# Altium PCB mag_pos_adapter_guide.PcbDoc
Units mm, origin at the board's own origin, x right, y up, seen from the top; angles counter-clockwise.
Board outline 27 x 27 mm, 2 copper layers (Top Layer, Bottom Layer), stack 1.071 mm thick; 9 components, 7 nets, 18 pads, 0 vias.
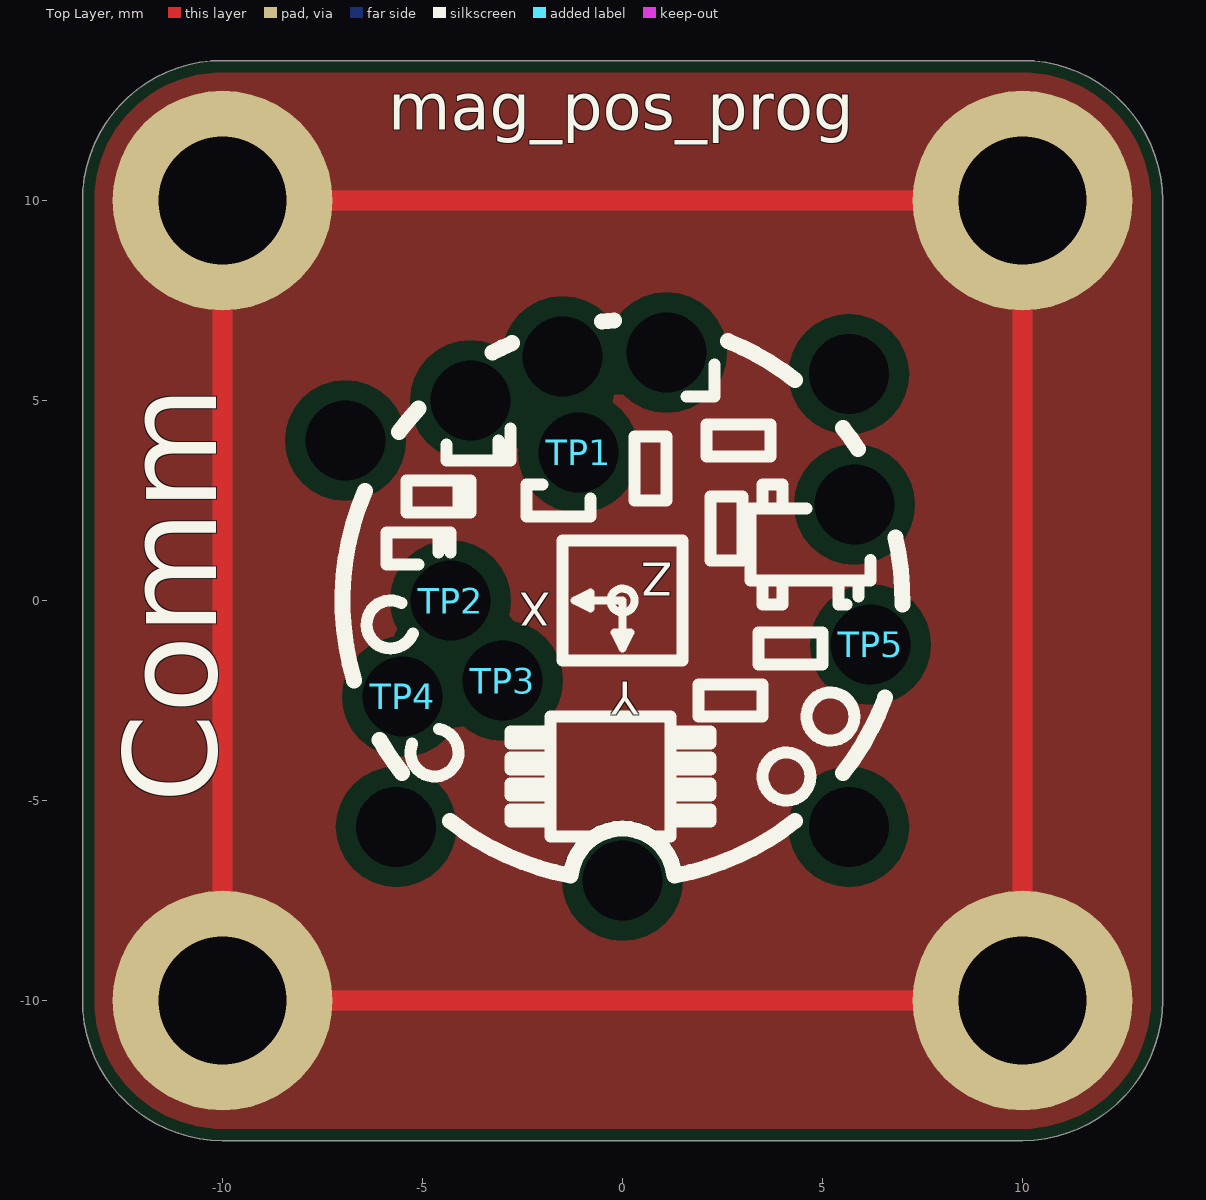
[diagram p0: Top Layer view]
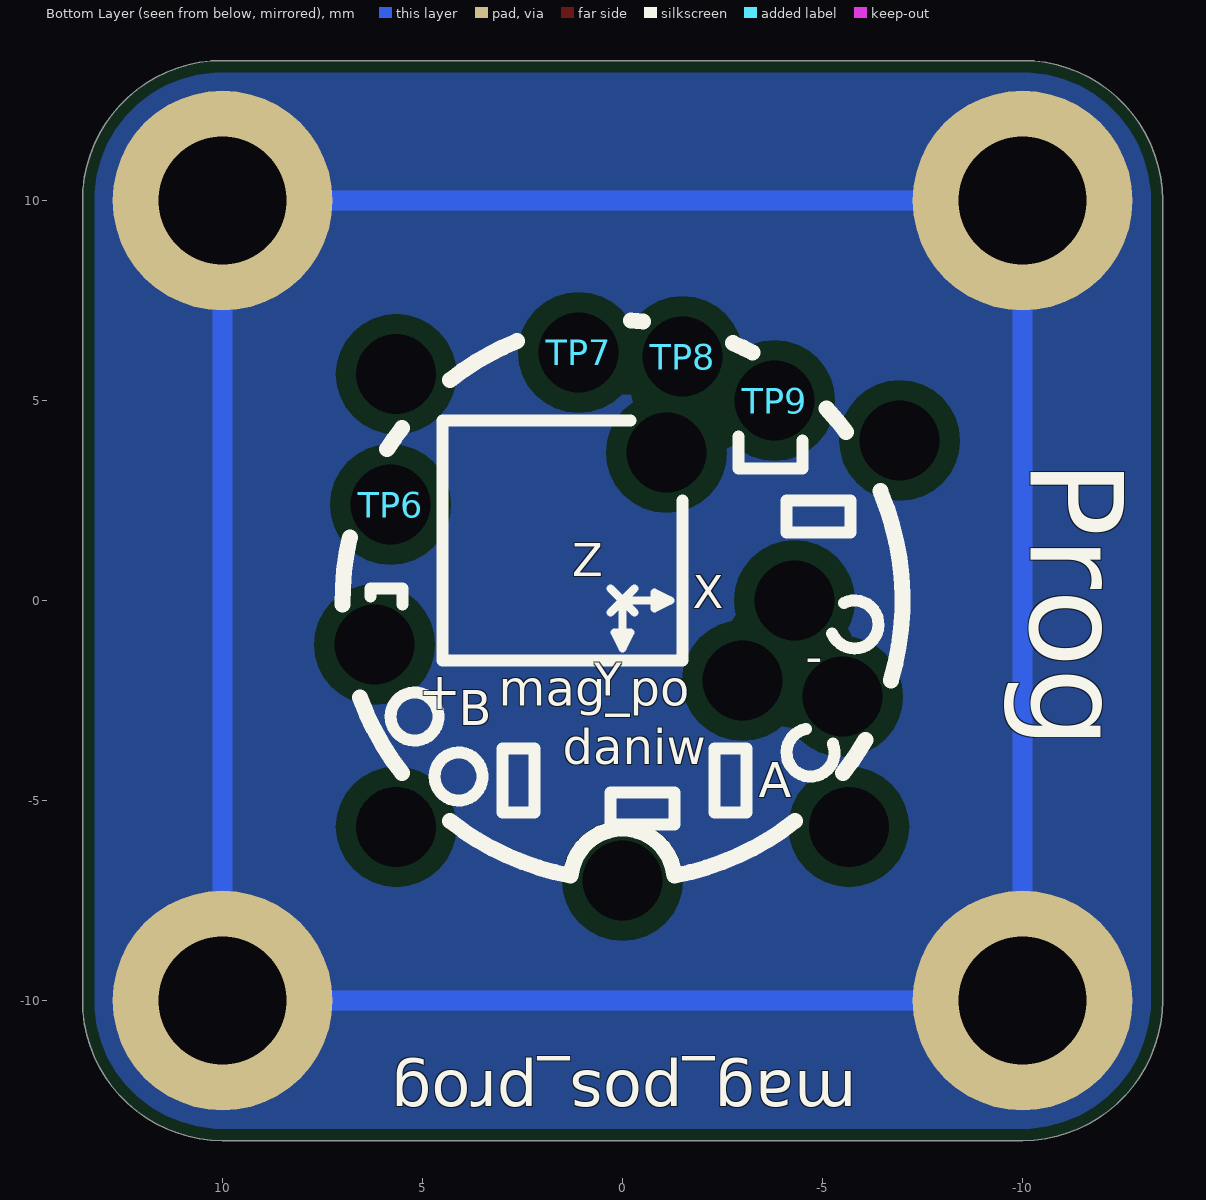
[diagram p1: Bottom Layer view, seen from below]

## Layer stack, top to bottom
Top Solder: solder mask 0.0102, Solder Resist, Dk 3.5
Top Layer: signal copper 0.0356
Dielectric 1: dielectric 1, FR-4, Dk 4.8
Bottom Layer: signal copper 0.0356
Bottom Solder: solder mask 0.0102, Solder Resist, Dk 3.5

## Board outline
-10,-13.5 cw(c-10,-10) -13.5,-10 -13.5,10 cw(c-10,10) -10,13.5 10,13.5 cw(c10,10) 13.5,10 13.5,-10 cw(c10,-10) 10,-13.5

## Design rules (kind name [scope] priority, off if disabled: settings)
Clearance [All] p1: gap=0.2 ignorepadtopadclearanceinfootprint=FALSE except(0: Arc-Hole Track-Hole SMDPad-Hole THPad-Hole Via-Hole Fill-Hole Region-Hole Text-Hole; 0.5: Poly-Hole)
ComponentClearance [All] p1: gap=0.2 collisioncheckmode=3 verticalgap=0.2 showdistances=FALSE
HoleSize [All] p1: absolutevalues=TRUE maxlimit=3.2 minlimit=0.3 maxpercent=80.000 minpercent=20.000
HoleToHoleClearance [All] p1: gap=0.3 allowstackedmicrovias=TRUE
MinimumAnnularRing [All] p1: minimumring=0.15
MinimumSolderMaskSliver [All] p1: minsoldermaskwidth=0.1
PolygonConnect PolygonConnect_Standoff [(ObjectKind = 'Pad') And (PadViaLibraryTemplate = 'c550h320')] p1: connectstyle=Direct reliefconductorwidth=0.254 reliefentries=4 polygonreliefangle="90 Angle" airgapwidth=0.254
PolygonConnect [All] p2: thpad.connectstyle=Relief thpad.reliefconductorwidth=0.3 thpad.reliefentries=4 thpad.polygonreliefangle="90 Angle" thpad.airgapwidth=0.3 smdpad.connectstyle=Relief smdpad.reliefconductorwidth=0.25 smdpad.reliefentries=4 smdpad.polygonreliefangle="90 Angle" smdpad.airgapwidth=0.25 via.connectstyle=Direct via.reliefconductorwidth=0.254 via.reliefentries=4 via.polygonreliefangle="90 Angle" via.airgapwidth=0.254
RoutingVias [All] p1: holewidth=0.35 width=0.7 viastyle="Through Hole" minholewidth=0.3 minwidth=0.65 maxholewidth=0.5 maxwidth=3
SilkToSilkClearance [All] p1: silktosilkclearance=0.1
SilkToSolderMaskClearance [IsPad] p1: minsilkscreentomaskgap=0.15 clearancetoexposedcopper=TRUE
SolderMaskExpansion SolderMaskExpansion_Via [IsVia] p1: expansion=0.102 istentingtop=TRUE
SolderMaskExpansion [All] p2: expansion=0.05 istentingtop=FALSE
Width [All] p1: maxlimit=0.5 minlimit=0.2 preferedwidth=0.2 minimp=50.000000 maximp=50.000000 favimp=50.000000
24 further rules are at their usual default settings.

## Classes and differential pairs
component class mag_pos_adapter: TP1 TP2 TP3 TP4 TP5 TP6 TP7 TP8

## Components (designator, comment, footprint, x,y, rotation, side; value= is the part's Value field where it differs from the comment)
TP1 "VCC" TP_SPRING_PROBE_1.7MM_2.5MM -1.1,3.7 r153.5 top
TP2 "RST" TP_SPRING_PROBE_1.7MM_2.5MM -4.3,0 r180 top
TP3 "TEST" TP_SPRING_PROBE_1.7MM_2.5MM -3,-2 r180 top
TP4 "GND" TP_SPRING_PROBE_1.7MM_2.5MM -5.5,-2.4 r270 top
TP5 "+5V" TP_SPRING_PROBE_1.7MM_2.5MM 6.2,-1.1 r270 top
TP6 "GND" TP_SPRING_PROBE_1.7MM_2.5MM 5.8,2.4 r270 bottom
TP7 "RX" TP_SPRING_PROBE_1.7MM_2.5MM 1.1,6.2 r0 bottom
TP8 "TX" TP_SPRING_PROBE_1.7MM_2.5MM -1.5,6.1 r153.5 bottom
TP9 "+5V" TP_SPRING_PROBE_1.7MM_2.5MM -3.8,5 r153.5 bottom

## Footprints (in the part's own frame and the unit in brackets; to place one, negate y for a bottom-side part, rotate by r counter-clockwise, add the part's x,y. Pads: shape width x height; smd on the part's side, far side on the other; paste and mask are expansions set on the pad)
TP_SPRING_PROBE_1.7MM_2.5MM [mm] "Spring probe sleeve 1.7mm hole diameter, 2.5mm pad size, Harwin S25-022"
  round 0 hole 2 unplated: 1(0,0)
  body extent -0.91,-0.91 0.92,0.91, height 5.44

## Part data
TP1 TP2 TP3 TP4 TP5 TP6 TP7 TP8 TP9: library part TP_SPRING_PROBE_1.7MM, "Spring probe sleeve 1.7mm hole diameter, 2.5mm pad size, Harwin S25-022", System=Connector

## Free pads (board coordinates)
  round 5.5 hole 3.2: 0(-10,-10) 0(-10,10) 0(10,-10) 0(10,10)
  round 0 hole 2 unplated: 0(-6.928,4) 0(-5.657,-5.657) 0(0,-7) 0(5.657,-5.657) 0(5.657,5.657)

## Nets (pads, with @x,y where several pads share a name; then routed paths per layer and width w, separated by ;. In a path a pad name is that pad's centre, name@x,y a point inside that pad or via, vN(x,y) a via of type N, cw(c..) or ccw(c..) an arc to the next point about the centre after c; other vN are vias at no path point)
+3V3: 
+5V: 
GND: pad.0@10,10 pad.0@10,-10 pad.0@-10,10 pad.0@-10,-10 | length 160
  Top Layer w0.5: pad.0@-10,-10 10,-10 10,10 -10,10 pad.0@-10,-10
  Bottom Layer w0.5: pad.0@-10,-10 10,-10 10,10 -10,10 pad.0@-10,-10
RX: 
SBWTCK: 
SBWTDIO: 
TX: 
pads on no net: TP1.1 TP2.1 TP3.1 TP4.1 TP5.1 TP6.1 TP7.1 TP8.1 TP9.1

## Polygon pours and split planes (outlines as drawn)
GND on Top Layer "GND_L01_P011" (solid, remove dead copper, pour order 11): -13.2,-10 -13.2,10 cw(c-10,10) -10,13.2 10,13.2 cw(c10,10) 13.2,10 13.2,-10 cw(c10,-10) 10,-13.2 -10,-13.2 cw(c-10,-10)
no net on Top Layer "NONET_L01_P009" (solid, remove dead copper, pour order 9): 31,-3.5
GND on Bottom Layer "GND_L02_P010" (solid, remove dead copper, pour order 10): -13.2,-10 -13.2,10 cw(c-10,10) -10,13.2 10,13.2 cw(c10,10) 13.2,10 13.2,-10 cw(c10,-10) 10,-13.2 -10,-13.2 cw(c-10,-10)

## Silkscreen, mask and mechanical layers (free items; w line width, h text height)
Top Overlay:
  circle w0.2: c0,0 r0.3
  circle w0.3: c5.2,-2.9 r0.6
  circle w0.3: c4.1,-4.4 r0.6
  lines w0.2: -1.2,0 0,0 0,-1.2 ; -1.2,0 -0.8,-0.2 -0.8,0.2 -1.2,0 ; 0,-1.2 0.2,-0.8 -0.2,-0.8 0,-1.2
  lines w0.3: -5.532,-0.063 ccw(c-5.8,-0.6) -5.243,-0.823 ; -5.257,-3.577 ccw(c-4.7,-3.8) -4.582,-3.212 ; -5.1,0.9 -5.9,0.9 -5.9,1.7 -4.3,1.7 -4.3,1.2 ; -4.6,1.2 -4.6,1.7 ; -4.4,3.9 -4.4,3.5 -2.8,3.5 -2.8,4.3 ; -4.1,2.2 -4.1,3 ; -3.1,3.5 -3.1,4 ; -2,2.9 -2.4,2.9 -2.4,2.1 -0.8,2.1 -0.8,2.546 ; -1.8,-5.525 -2.8,-5.525 -2.8,-5.225 -1.8,-5.225 ; -1.8,-4.875 -2.8,-4.875 -2.8,-4.575 -1.8,-4.575 ; -1.8,-4.225 -2.8,-4.225 -2.8,-3.925 -1.8,-3.925 ; -1.8,-3.575 -2.8,-3.575 -2.8,-3.275 -1.8,-3.275 ; -0.667,-5.9 -1.8,-5.9 -1.8,-2.9 1.2,-2.9 1.2,-5.9 0.667,-5.9 ; 1.2,-5.525 2.2,-5.525 2.2,-5.225 1.2,-5.225 ; 1.2,-4.875 2.2,-4.875 2.2,-4.575 1.2,-4.575 ; 1.2,-4.225 2.2,-4.225 2.2,-3.925 1.2,-3.925 ; 1.2,-3.575 2.2,-3.575 2.2,-3.275 1.2,-3.275 ; 1.6,5.1 2.3,5.1 2.3,5.9 ; 3.5,0.5 3.5,-0.1 4,-0.1 4,0.5 ; 3.5,2.3 3.5,2.9 4,2.9 4,2.3 ; 4.6,2.3 3.2,2.3 3.2,0.5 6.2,0.5 6.2,1.012 ; 5.4,0.5 5.4,-0.1 5.6,-0.1 ; 5.9,0.1 5.9,0.5 ; -5.4,2.2 -5.4,3 -3.8,3 -3.8,2.2 -5.4,2.2 ; -1.5,-1.5 1.5,-1.5 1.5,1.5 -1.5,1.5 -1.5,-1.5 ; 0.3,2.5 0.3,4.1 1.1,4.1 1.1,2.5 0.3,2.5 ; 1.9,-2.9 3.5,-2.9 3.5,-2.1 1.9,-2.1 1.9,-2.9 ; 2.1,3.6 2.1,4.4 3.7,4.4 3.7,3.6 2.1,3.6 ; 2.2,1 2.2,2.6 3,2.6 3,1 2.2,1 ; 3.4,-1.6 5,-1.6 5,-0.8 3.4,-0.8 3.4,-1.6
  lines w0.4: -6.708,-2.002 cw(c0,0) -6.444,2.735 ; -6.072,-3.484 ccw(c0,0) -5.516,-4.31 ; -5.59,4.213 cw(c0,0) -5.097,4.798 ; -4.31,-5.516 ccw(c0,0) -1.294,-6.879 cw(c0,-7) 1.294,-6.879 ccw(c0,0) 4.31,-5.516 ; -3.252,6.199 cw(c0,0) -2.757,6.434 ; -0.513,6.981 cw(c0,0) -0.212,6.997 ; 2.637,6.484 cw(c0,0) 4.31,5.516 ; 5.516,-4.31 ccw(c0,0) 6.567,-2.425 ; 5.516,4.31 cw(c0,0) 5.885,3.79 ; 6.819,1.581 cw(c0,0) 6.999,-0.1
  text "mag_pos_prog" at -5.855,11.376 h2
  text "Z" at 1.249,1.217 h1.4 r180
  text "X" at -1.809,0.468 h1.4 r180
  text "Y" at 0.404,-1.754 h1.4 r180
  text "Comm" at -9.393,-5.07 h4 r90
Bottom Overlay:
  circle w0.3: c4.1,-4.4 r0.6
  circle w0.3: c5.2,-2.9 r0.6
  lines w0.2: -0.3,-0.3 0.3,0.3 ; -0.3,0.3 0.3,-0.3 ; -1.2,0 -0.8,0.2 -0.8,-0.2 -1.2,0 ; -1.2,0 0,0 0,-1.2 ; 0,-1.2 -0.2,-0.8 0.2,-0.8 0,-1.2
  lines w0.3: -5.532,-0.063 ccw(c-5.8,-0.6) -5.243,-0.823 ; -5.257,-3.577 ccw(c-4.7,-3.8) -4.582,-3.212 ; -4.5,4 -4.5,3.3 -2.9,3.3 -2.9,4.1 ; -1.5,2.5 -1.5,-1.5 4.5,-1.5 4.5,4.5 -0.2,4.5 ; 5.5,-0.1 5.5,0.3 6.3,0.3 6.3,0.1 ; -5.7,1.7 -4.1,1.7 -4.1,2.5 -5.7,2.5 -5.7,1.7 ; -3.1,-5.3 -2.3,-5.3 -2.3,-3.7 -3.1,-3.7 -3.1,-5.3 ; -1.3,-5.6 0.3,-5.6 0.3,-4.8 -1.3,-4.8 -1.3,-5.6 ; 2.2,-5.3 3,-5.3 3,-3.7 2.2,-3.7 2.2,-5.3
  lines w0.4: -6.708,-2.002 cw(c0,0) -6.444,2.735 ; -6.072,-3.484 ccw(c0,0) -5.516,-4.31 ; -5.59,4.213 cw(c0,0) -5.097,4.798 ; -4.31,-5.516 ccw(c0,0) -1.294,-6.879 cw(c0,-7) 1.294,-6.879 ccw(c0,0) 4.31,-5.516 ; -3.252,6.199 cw(c0,0) -2.757,6.434 ; -0.513,6.981 cw(c0,0) -0.212,6.997 ; 2.637,6.484 cw(c0,0) 4.31,5.516 ; 5.516,-4.31 ccw(c0,0) 6.567,-2.425 ; 5.516,4.31 cw(c0,0) 5.885,3.79 ; 6.819,1.581 cw(c0,0) 6.999,-0.1
  text "Prog" at -9.437,3.524 h4 r90
  text "Z" at 1.261,0.327 h1.4
  text "X" at -1.759,-0.466 h1.4
  text "-" at -5,-0.912 h1.5 r180
  text "+" at 4.031,-1.602 h1.6 r180
  text "Y" at 0.703,-2.656 h1.4
  text "mag_po" at 3.089,-2.918 h1.5
  text "B" at 4.1,-3.4 h1.5
  text "daniw" at 1.5,-4.385 h1.5
  text "A" at -3.4,-5.2 h1.5
  text "mag_pos_prog" at -5.855,-11.376 h2 r180
Board:
  the board outline again, w0.2